# Altium PCB Near-H-Field-Probe.PcbDoc
Units mm, origin at the board's own origin, x right, y up, seen from the top; angles counter-clockwise.
Board outline 99.56 x 12.88 mm, 2 copper layers (Top Layer, Bottom Layer), stack 1.135 mm thick; 1 components, 2 nets, 6 pads, 487 vias.
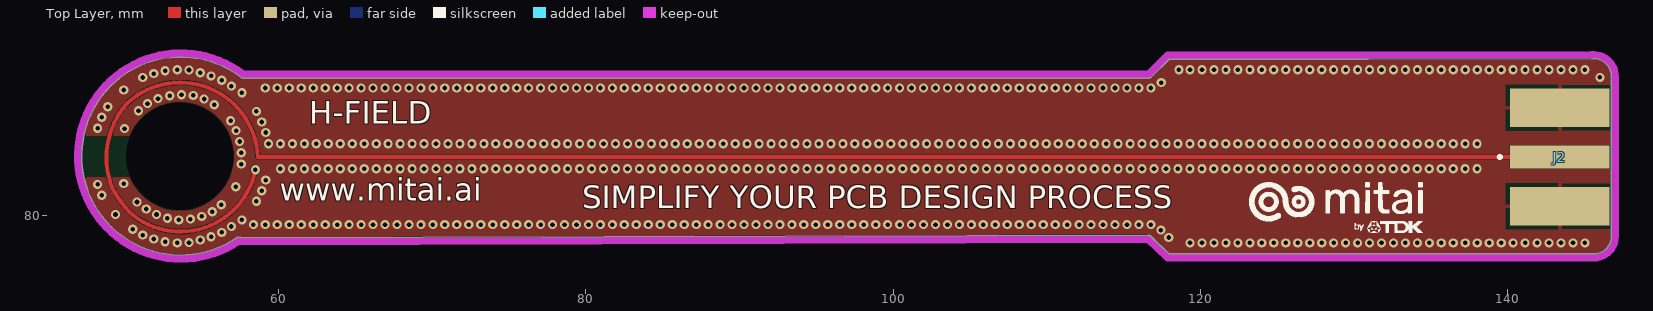
[diagram p0: Top Layer view]
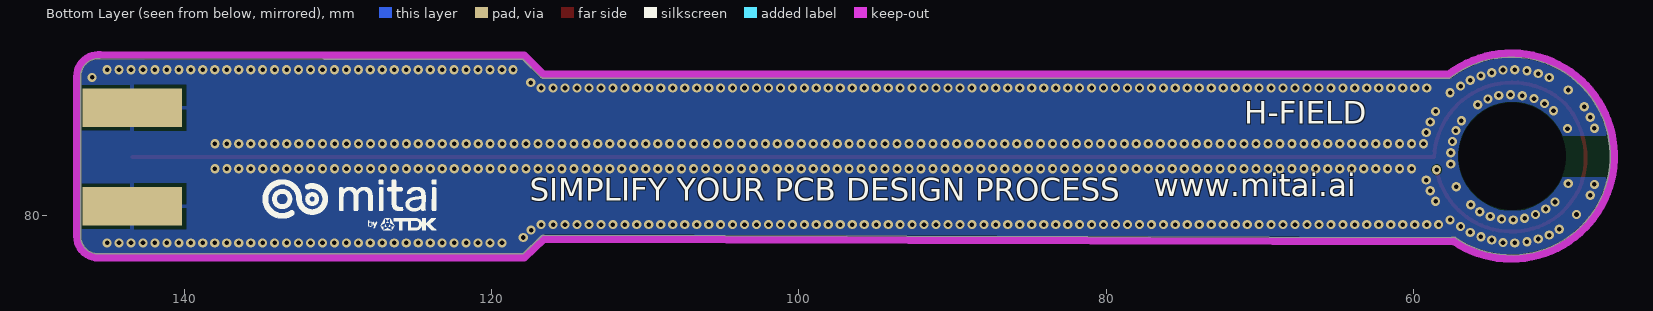
[diagram p1: Bottom Layer view, seen from below]

## Layer stack, top to bottom
Top Solder: solder mask 0.0127, Solder Resist, Dk 3.5
Top Layer: signal copper 0.035
Dielectric 1: dielectric 1.065, FR-4, Dk 4.8
Bottom Layer: signal copper 0.035
Bottom Solder: solder mask 0.0127, Solder Resist, Dk 3.5

## Board outline
57.263,78.566 cw(c53.621,83.882) 57.534,89.002 ccw(c57.687,89.2) 57.687,88.95 116.632,88.95 ccw(c116.632,89.2) 116.809,89.023 117.97,90.184 130.924,90.184 145.467,90.217 145.593,90.217 cw(c145.593,89.07) 146.74,89.07 146.74,88.943 146.74,78.785 146.74,78.658 cw(c145.593,78.658) 145.593,77.511 145.466,77.511 117.963,77.511 116.768,78.663 ccw(c116.594,78.483) 116.593,78.734 57.562,78.553 ccw(c57.404,78.359)

## Design rules (kind name [scope] priority, off if disabled: settings)
Clearance [All] p1: gap=0.05 ignorepadtopadclearanceinfootprint=FALSE
HoleSize [All] p1: absolutevalues=TRUE maxlimit=10 minlimit=0.025 maxpercent=80.000 minpercent=20.000
NetAntennae [InNetClass('All Nets')] p1: netantennaetolerance=0
PlaneConnect [All] p1: planeconnectstyle=Direct reliefexpansion=0.508 reliefentries=4 reliefconductorwidth=0.254 reliefairgap=0.254
PolygonConnect [All] p1: thpad.connectstyle=Direct thpad.reliefconductorwidth=0.254 thpad.reliefentries=4 thpad.polygonreliefangle="90 Angle" thpad.airgapwidth=0.254 smdpad.connectstyle=Relief smdpad.reliefconductorwidth=0.254 smdpad.reliefentries=4 smdpad.polygonreliefangle="90 Angle" smdpad.airgapwidth=0.254 via.connectstyle=Direct via.reliefconductorwidth=0.254 via.reliefentries=4 via.polygonreliefangle="90 Angle" via.airgapwidth=0.254
RoutingVias [All] p1: holewidth=0.3 width=0.7 viastyle="Through Hole" minholewidth=0.3 minwidth=0.6 maxholewidth=0.8 maxwidth=1
ShortCircuit [All] p1: allowed=TRUE
SilkToSolderMaskClearance [IsPad] p1: minsilkscreentomaskgap=0.2 clearancetoexposedcopper=TRUE
SolderMaskExpansion [All] p1: expansion=0.102 istentingtop=FALSE
UnRoutedNet [OnLayer('Top Layer')] p1: checkbadconnections=TRUE
Width [All] p1: maxlimit=0.254 minlimit=0.254 preferedwidth=0.254
24 further rules are at their usual default settings.

## Components (designator, comment, footprint, x,y, rotation, side; value= is the part's Value field where it differs from the comment)
J2 "CON-SMA-EDGE-S" RFSOLUTIONS_CON-SMA-EDGE-S 141.883,83.82 r180 top

## Footprints (in the part's own frame and the unit in brackets; to place one, negate y for a bottom-side part, rotate by r counter-clockwise, add the part's x,y. Pads: shape width x height; smd on the part's side, far side on the other; paste and mask are expansions set on the pad)
RFSOLUTIONS_CON-SMA-EDGE-S [mm]
  rect 6.5x1.5 smd: 1(-1.5,0)
  rect 6.5x2.5 smd: G1(-1.5,3.2) G2(-1.5,-3.2)
  rect 6.5x2.5 smd far side: G3(-1.5,3.2) G4(-1.5,-3.2)
  silkscreen extent 2.3,-0.1 2.5,0.1, body extent -11.27,-3.18 2.06,3.18, height 3.55

## Part data
J2: "SMA Connector Jack, Female Socket - Board Edge, End Launch Solder", Package=None, Check_prices=https://www.snapeda.com/parts/CON-SMA-EDGE-S/RF+Solutions/view-part/?ref=eda, Digi-Key_Part_Number=CON-SMA-EDGE-S-ND, MF="RF Solutions", MP=CON-SMA-EDGE-S, Purchase-URL=https://pricing.snapeda.com/search/part/CON-SMA-EDGE-S/?ref=eda, SnapEDA_Link=https://www.snapeda.com/parts/CON-SMA-EDGE-S/RF+Solutions/view-part/?ref=snap

## Free pads (board coordinates)
  round 0 hole 7 unplated: 2(53.558,83.865)

## Via types
v1: diameter 0.6, hole 0.3, Top Layer to Bottom Layer, tented both sides, 487 vias

## Nets (pads, with @x,y where several pads share a name; then routed paths per layer and width w, separated by ;. In a path a pad name is that pad's centre, name@x,y a point inside that pad or via, vN(x,y) a via of type N, cw(c..) or ccw(c..) an arc to the next point about the centre after c; other vN are vias at no path point)
GND: J2.G1 J2.G2 J2.G3 J2.G4
  other v1: 53.391,78.226 119.321,78.226 120.1,78.226 120.878,78.226 121.657,78.226 122.436,78.226 123.215,78.226 123.994,78.226 124.773,78.226 125.552,78.226 126.331,78.226 127.11,78.226 127.889,78.226 128.668,78.226 129.447,78.226 130.226,78.226 131.005,78.226 131.784,78.226 132.562,78.226 133.341,78.226 134.12,78.226 134.899,78.226 135.678,78.226 136.457,78.226 137.236,78.226 138.015,78.226 138.794,78.226 139.573,78.226 140.352,78.226 141.131,78.226 141.91,78.226 142.689,78.226 143.467,78.226 144.246,78.226 145.025,78.226 54.163,78.248 52.603,78.302 54.894,78.421 51.867,78.48 117.932,78.582 55.601,78.632 51.156,78.734 56.286,78.912 117.424,79.064 50.495,79.115 56.922,79.294 58.352,79.42 59.131,79.42 59.91,79.42 60.689,79.42 61.468,79.42 62.247,79.42 63.026,79.42 63.805,79.42 64.584,79.42 65.363,79.42 66.142,79.42 66.921,79.42 67.699,79.42 68.478,79.42 69.257,79.42 70.036,79.42 70.815,79.42 71.594,79.42 72.373,79.42 73.152,79.42 73.931,79.42 74.71,79.42 75.489,79.42 76.268,79.42 77.047,79.42 77.826,79.42 78.604,79.42 79.383,79.42 80.162,79.42 80.941,79.42 81.72,79.42 82.499,79.42 83.278,79.42 84.057,79.42 84.836,79.42 85.615,79.42 86.394,79.42 87.173,79.42 87.952,79.42 88.731,79.42 89.51,79.42 90.288,79.42 91.067,79.42 91.846,79.42 92.625,79.42 93.404,79.42 94.183,79.42 94.962,79.42 95.741,79.42 96.52,79.42 97.299,79.42 98.078,79.42 98.857,79.42 99.636,79.42 100.415,79.42 101.194,79.42 101.972,79.42 102.751,79.42 103.53,79.42 104.309,79.42 105.088,79.42 105.867,79.42 106.646,79.42 107.425,79.42 108.204,79.42 108.983,79.42 109.762,79.42 110.541,79.42 111.32,79.42 112.099,79.42 112.877,79.42 113.656,79.42 114.435,79.42 115.214,79.42 115.993,79.42 116.772,79.42 53.492,79.725 57.607,79.725 54.254,79.775 52.756,79.826 54.991,79.953 49.378,80.08 52.045,80.08 55.668,80.255 51.384,80.436 56.266,80.713 50.775,80.893 58.547,80.944 48.489,81.325 58.903,81.63 57.201,81.884 48.209,82.036 49.911,82.087 59.157,82.315 60.113,83.052 60.892,83.052 61.671,83.052 62.45,83.052 63.229,83.052 64.008,83.052 64.787,83.052 65.566,83.052 66.345,83.052 67.124,83.052 67.903,83.052 68.682,83.052 69.461,83.052 70.239,83.052 71.018,83.052 71.797,83.052 72.576,83.052 73.355,83.052 74.134,83.052 74.913,83.052 75.692,83.052 76.471,83.052 77.25,83.052 78.029,83.052 78.808,83.052 79.587,83.052 80.366,83.052 81.144,83.052 81.923,83.052 82.702,83.052 83.481,83.052 84.26,83.052 85.039,83.052 85.818,83.052 86.597,83.052 87.376,83.052 88.155,83.052 88.934,83.052 89.713,83.052 90.492,83.052 91.271,83.052 92.05,83.052 92.828,83.052 93.607,83.052 94.386,83.052 95.165,83.052 95.944,83.052 96.723,83.052 97.502,83.052 98.281,83.052 99.06,83.052 99.839,83.052 100.618,83.052 101.397,83.052 102.176,83.052 102.955,83.052 103.734,83.052 104.512,83.052 105.291,83.052 106.07,83.052 106.849,83.052 107.628,83.052 108.407,83.052 109.186,83.052 109.965,83.052 110.744,83.052 111.523,83.052 112.302,83.052 113.081,83.052 113.86,83.052 114.639,83.052 115.417,83.052 116.196,83.052 116.975,83.052 117.754,83.052 118.533,83.052 119.312,83.052 120.091,83.052 120.87,83.052 121.649,83.052 122.428,83.052 123.207,83.052 123.986,83.052 124.765,83.052 125.544,83.052 126.323,83.052 127.101,83.052 127.88,83.052 128.659,83.052 129.438,83.052 130.217,83.052 130.996,83.052 131.775,83.052 132.554,83.052 133.333,83.052 134.112,83.052 134.891,83.052 135.67,83.052 136.449,83.052 137.228,83.052 138.006,83.052 57.556,83.357 57.556,84.093 59.334,84.678 60.113,84.678 60.892,84.678 61.671,84.678 62.45,84.678 63.229,84.678 64.008,84.678 64.787,84.678 65.566,84.678 66.345,84.678 67.124,84.678 67.903,84.678 68.682,84.678 69.461,84.678 70.239,84.678 71.018,84.678 71.797,84.678 72.576,84.678 73.355,84.678 74.134,84.678 74.913,84.678 75.692,84.678 76.471,84.678 77.25,84.678 78.029,84.678 78.808,84.678 79.587,84.678 80.366,84.678 81.144,84.678 81.923,84.678 82.702,84.678 83.481,84.678 84.26,84.678 85.039,84.678 85.818,84.678 86.597,84.678 87.376,84.678 88.155,84.678 88.934,84.678 89.713,84.678 90.492,84.678 91.271,84.678 92.05,84.678 92.828,84.678 93.607,84.678 94.386,84.678 95.165,84.678 95.944,84.678 96.723,84.678 97.502,84.678 98.281,84.678 99.06,84.678 99.839,84.678 100.618,84.678 101.397,84.678 102.176,84.678 102.955,84.678 103.734,84.678 104.512,84.678 105.291,84.678 106.07,84.678 106.849,84.678 107.628,84.678 108.407,84.678 109.186,84.678 109.965,84.678 110.744,84.678 111.523,84.678 112.302,84.678 113.081,84.678 113.86,84.678 114.639,84.678 115.417,84.678 116.196,84.678 116.975,84.678 117.754,84.678 118.533,84.678 119.312,84.678 120.091,84.678 120.87,84.678 121.649,84.678 122.428,84.678 123.207,84.678 123.986,84.678 124.765,84.678 125.544,84.678 126.323,84.678 127.101,84.678 127.88,84.678 128.659,84.678 129.438,84.678 130.217,84.678 130.996,84.678 131.775,84.678 132.554,84.678 133.333,84.678 134.112,84.678 134.891,84.678 135.67,84.678 136.449,84.678 137.228,84.678 138.006,84.678 57.455,84.83 59.157,85.414 57.226,85.541 49.962,85.668 48.209,85.694 58.903,86.1 56.871,86.176 48.489,86.405 58.547,86.786 50.876,86.837 48.87,87.091 55.804,87.218 51.46,87.294 55.143,87.599 52.146,87.624 52.908,87.802 54.432,87.827 53.67,87.878 57.607,88.005 49.911,88.183 59.131,88.31 59.91,88.31 60.689,88.31 61.468,88.31 62.247,88.31 63.026,88.31 63.805,88.31 64.584,88.31 65.363,88.31 66.142,88.31 66.921,88.31 67.699,88.31 68.478,88.31 69.257,88.31 70.036,88.31 70.815,88.31 71.594,88.31 72.373,88.31 73.152,88.31 73.931,88.31 74.71,88.31 75.489,88.31 76.268,88.31 77.047,88.31 77.826,88.31 78.604,88.31 79.383,88.31 80.162,88.31 80.941,88.31 81.72,88.31 82.499,88.31 83.278,88.31 84.057,88.31 84.836,88.31 85.615,88.31 86.394,88.31 87.173,88.31 87.952,88.31 88.731,88.31 89.51,88.31 90.288,88.31 91.067,88.31 91.846,88.31 92.625,88.31 93.404,88.31 94.183,88.31 94.962,88.31 95.741,88.31 96.52,88.31 97.299,88.31 98.078,88.31 98.857,88.31 99.636,88.31 100.415,88.31 101.194,88.31 101.972,88.31 102.751,88.31 103.53,88.31 104.309,88.31 105.088,88.31 105.867,88.31 106.646,88.31 107.425,88.31 108.204,88.31 108.983,88.31 109.762,88.31 110.541,88.31 111.32,88.31 112.099,88.31 112.877,88.31 113.656,88.31 114.435,88.31 115.214,88.31 115.993,88.31 116.772,88.31 56.922,88.435 117.45,88.665 56.286,88.818 51.156,88.996 146,89 55.601,89.097 51.867,89.25 54.894,89.309 52.603,89.427 54.163,89.482 53.391,89.504 118.597,89.505 119.321,89.504 120.1,89.504 120.878,89.504 121.657,89.504 122.436,89.504 123.215,89.504 123.994,89.504 124.773,89.504 125.552,89.504 126.331,89.504 127.11,89.504 127.889,89.504 128.668,89.504 129.447,89.504 130.226,89.504 131.005,89.504 131.784,89.504 132.562,89.504 133.341,89.504 134.12,89.504 134.899,89.504 135.678,89.504 136.457,89.504 137.236,89.504 138.015,89.504 138.794,89.504 139.573,89.504 140.352,89.504 141.131,89.504 141.91,89.504 142.689,89.504 143.467,89.504 144.246,89.504 145.025,89.504
PROBE_H: J2.1 | length 114.7
  Top Layer w0.254: v1@58.482,82.876 v1(58.482,82.997) ; v1@58.49,82.995 cw(c53.601,83.941) 50.552,80.006 cw(c50.709,80.205) 50.54,80.015 cw(c54.575,84.52) 49.141,81.865 cw(c49.371,81.974) 49.134,81.882 cw(c54.094,83.774) 50.134,87.31 cw(c50.323,87.139) 50.149,87.325 cw(c53.572,83.646) 53.572,88.67 cw(c53.572,83.599) 58.639,83.82 J2.1

## Polygon pours and split planes (outlines as drawn)
GND on Bottom Layer "BTTM_GND" (solid, pour order 0): 49.41,88.724 50.004,89.178 50.622,89.548 52.323,90.28 53.425,90.339 53.551,90.286 53.659,90.326 54.304,90.29 54.903,90.176 55.473,90.026 56.503,89.646 56.713,89.494 56.944,89.403 57.558,88.99 57.596,88.94 61.099,88.95 61.572,88.951 69.535,88.95 69.632,88.943 69.632,88.929 69.68,88.951 69.737,88.951 72.922,88.943 79.66,88.943 80.226,88.917 81.872,88.943 92.152,88.903 102.863,88.891 116.752,88.943 117.37,89.548 117.996,90.114 131.788,90.191 145.864,90.144 146.212,90.179 146.535,89.679 146.727,89.178 146.737,86.871 146.771,78.805 146.495,77.478 117.813,77.471 116.712,78.571 100.172,78.526 78.814,78.467 68.055,78.438 57.462,78.514 55.949,77.873 55.33,77.681 53.945,77.407 52.907,77.478 52.271,77.573 51.543,77.773 50.373,78.26 49.188,79.155 48.408,80.094 48.035,80.669 47.794,81.131 47.573,81.658 47.42,82.08 47.22,83.043 47.179,83.727 47.179,84.063 47.22,84.626 47.463,85.877 47.833,86.684 48.204,87.355 48.762,88.095
GND on Top Layer "TOP_GND" (solid, pour order 1): 49.668,89.041 50.299,89.497 50.572,89.574 50.614,89.631 51.112,89.866 51.463,90.042 52.996,90.338 53.373,90.369 53.368,90.272 53.373,90.369 53.887,90.338 54.662,90.242 56.124,89.913 57.562,89.002 58.462,88.943 58.532,88.943 60.584,88.963 86.287,88.963 88.899,88.95 92.011,88.963 94.788,88.943 97.922,88.95 100.823,88.943 103.696,88.95 106.689,88.943 109.461,88.95 111.866,88.943 113.823,88.95 116.307,88.95 116.736,88.95 117.866,90.184 118.121,90.192 118.226,90.146 124.215,90.168 130.644,90.192 138.077,90.184 139.72,90.184 145.538,90.272 146.203,90.042 146.707,89.631 146.741,78.904 146.707,78.11 146.635,78.033 146.316,77.719 146.053,77.552 145.153,77.523 143.718,77.522 139.559,77.518 131.594,77.511 118.321,77.512 117.97,77.518 116.839,78.595 116.828,78.595 116.695,78.734 115.928,78.734 111.973,78.734 104.345,78.696 98.209,78.677 84.903,78.653 77.454,78.614 57.932,78.554 57.561,78.552 57.515,78.595 57.243,78.552 56.519,78.11 56.039,77.856 55.503,77.719 54.929,77.572 54.43,77.489 53.852,77.442 52.996,77.468 52.239,77.572 51.541,77.783 51.055,77.988 50.916,78.033 50.821,78.11 50.442,78.307 49.484,78.948 49.001,79.412 48.911,79.522 48.934,79.505 48.911,79.505 48.707,79.732 48.569,79.87 48.43,80.079 48.057,80.641 47.741,81.247 47.567,81.665 47.516,81.808 47.483,81.905 47.36,82.324 47.309,82.541 47.218,83.339 47.172,84.335 47.346,85.462 47.424,85.75 47.483,85.837 47.483,85.94 47.741,86.541 47.922,86.965 48.341,87.68 48.641,88.012 48.647,88.041 49.176,88.606 49.484,88.879 49.556,88.929

## Keep-outs
Keep-Out Layer:
  lines w0.5: 57.35,78.302 116.594,78.483 117.862,77.26 145.466,77.26 ; 57.404,78.359 cw(c53.621,83.882) 57.687,89.2 116.632,89.2 117.866,90.434 130.924,90.434 145.466,90.467 ; 145.593,77.26 ccw(c145.593,78.658) 146.99,78.658 ; 145.593,90.467 cw(c145.593,89.07) 146.99,89.07 ; 146.99,78.785 146.99,88.943

## Other copper
Top Layer:
  pour cut-out: 46.99,85.215 50.508,85.215 50.719,82.515 46.863,82.515
Bottom Layer:
  pour cut-out: 46.99,85.215 50.508,85.215 50.719,82.515 46.863,82.515

## Silkscreen, mask and mechanical layers (free items; w line width, h text height)
Top Overlay:
  drawing of 16 lines, arcs and shapes, not listed
  text "H-FIELD" at 62,85.5 h2.54
  text "www.mitai.ai" at 60.055,80.5 h2.54
  text "SIMPLIFY YOUR PCB DESIGN PROCESS" at 79.75,80 h2.54
Bottom Overlay:
  drawing of 16 lines, arcs and shapes, not listed
  text "H-FIELD" at 71,85.5 h2.54
  text "www.mitai.ai" at 76.893,80.763 h2.54
  text "SIMPLIFY YOUR PCB DESIGN PROCESS" at 117.5,80.5 h2.54